# Altium PCB cando_pro.PcbDoc
Units mil, origin at the board's own origin, x right, y up, seen from the top; angles counter-clockwise.
Board outline 1900 x 629.92 mil, 2 copper layers (Top Layer, Bottom Layer); 29 components, 20 nets, 136 pads, 50 vias.
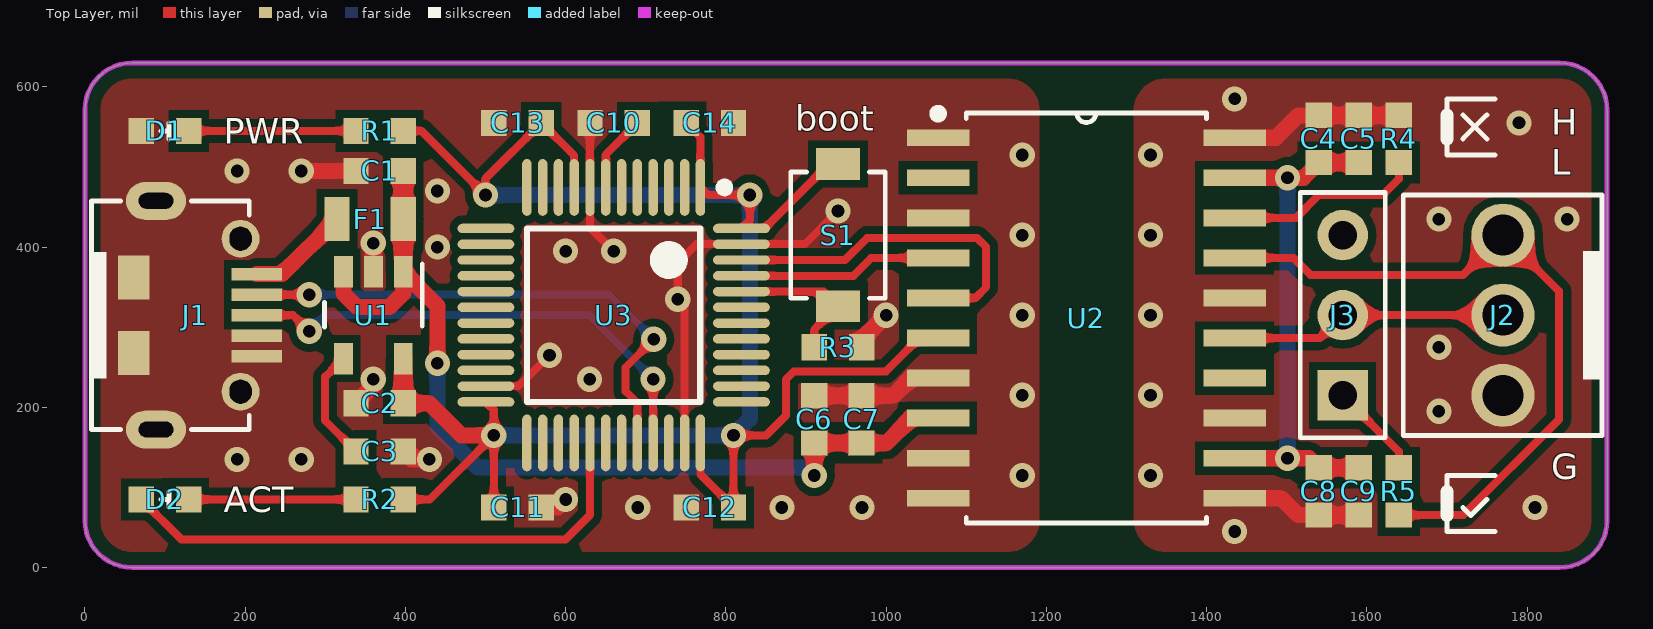
[diagram p0: Top Layer view]
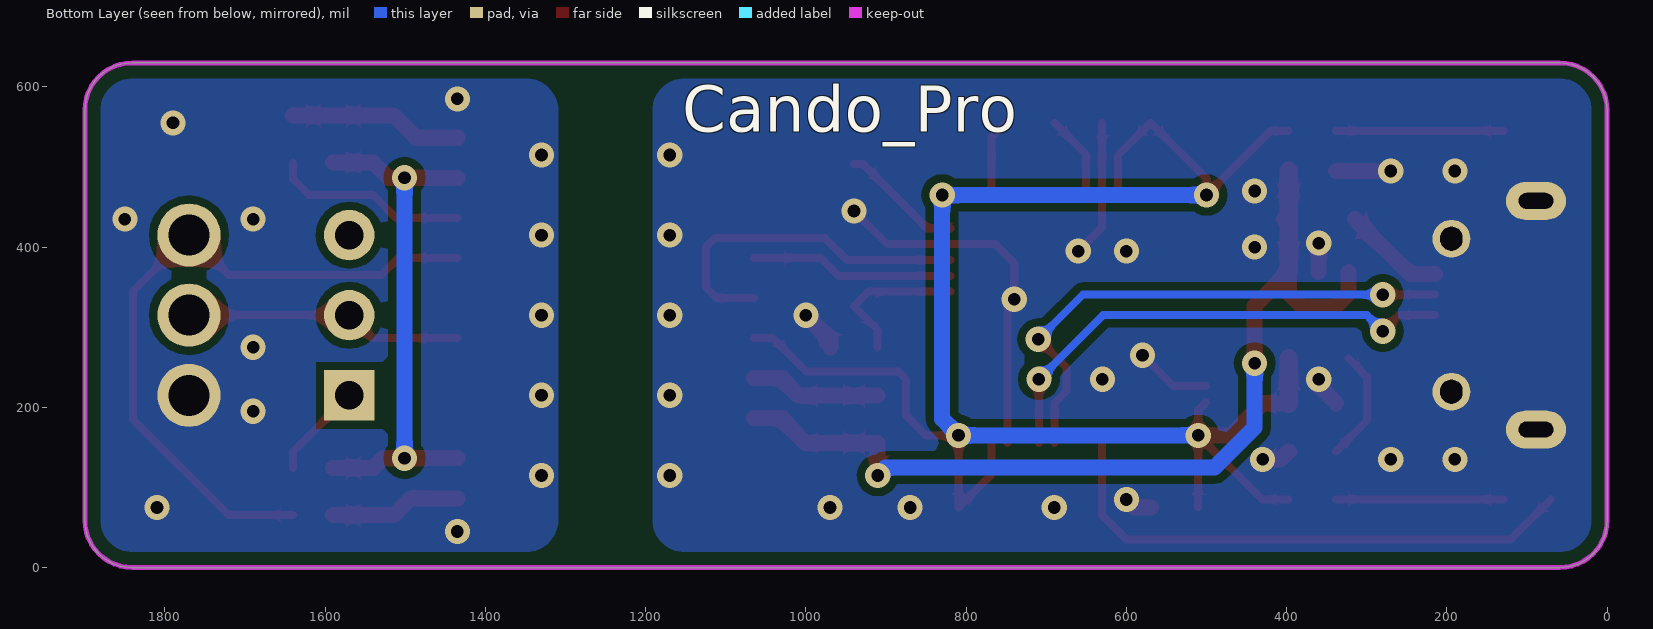
[diagram p1: Bottom Layer view, seen from below]

## Layer stack, top to bottom
Top Solder: solder mask 0.4, Solder Resist, Dk 3.5
Top Layer: signal copper 1.4
Dielectric 1: dielectric 12.6, FR-4, Dk 4.8
Bottom Layer: signal copper 1.4
Bottom Solder: solder mask 0.4, Solder Resist, Dk 3.5

## Board outline
0,59.06 0,570.87 cw(c59.06,570.87) 59.05,629.92 1840.94,629.92 cw(c1840.94,570.87) 1900,570.87 1900,59.06 cw(c1840.94,59.06) 1840.94,0 59.06,0 cw(c59.06,59.06)

## Design rules (kind name [scope] priority, off if disabled: settings)
Clearance Clearance_16 [InNamedPolygon('GND')] p1: gap=10 ignorepadtopadclearanceinfootprint=FALSE except(0: Arc-Hole Track-Hole SMDPad-Hole THPad-Hole Via-Hole Fill-Hole Poly-Hole Region-Hole Text-Hole)
Clearance Clearance_15 [InNamedPolygon('GND')] p2: gap=10 ignorepadtopadclearanceinfootprint=FALSE except(0: Arc-Hole Track-Hole SMDPad-Hole THPad-Hole Via-Hole Fill-Hole Poly-Hole Region-Hole Text-Hole)
Clearance Clearance_14 [InNamedPolygon('PGND')] p3: gap=10 ignorepadtopadclearanceinfootprint=FALSE except(0: Arc-Hole Track-Hole SMDPad-Hole THPad-Hole Via-Hole Fill-Hole Poly-Hole Region-Hole Text-Hole)
Clearance Clearance_13 [InNamedPolygon('PGND')] p4: gap=10 ignorepadtopadclearanceinfootprint=FALSE except(0: Arc-Hole Track-Hole SMDPad-Hole THPad-Hole Via-Hole Fill-Hole Poly-Hole Region-Hole Text-Hole)
Clearance Clearance_12 [InNamedPolygon('PGND')] p5: gap=10 ignorepadtopadclearanceinfootprint=FALSE except(0: Arc-Hole Track-Hole SMDPad-Hole THPad-Hole Via-Hole Fill-Hole Poly-Hole Region-Hole Text-Hole)
Clearance Clearance_11 [InNamedPolygon('PGND')] p6: gap=10 ignorepadtopadclearanceinfootprint=FALSE except(0: Arc-Hole Track-Hole SMDPad-Hole THPad-Hole Via-Hole Fill-Hole Poly-Hole Region-Hole Text-Hole)
Clearance Clearance_10 [InNamedPolygon('Bottom')] p7: gap=10 ignorepadtopadclearanceinfootprint=FALSE except(0: Arc-Hole Track-Hole SMDPad-Hole THPad-Hole Via-Hole Fill-Hole Poly-Hole Region-Hole Text-Hole)
Clearance Clearance_9 [InNamedPolygon('Bottom')] p8: gap=10 ignorepadtopadclearanceinfootprint=FALSE except(0: Arc-Hole Track-Hole SMDPad-Hole THPad-Hole Via-Hole Fill-Hole Poly-Hole Region-Hole Text-Hole)
Clearance Clearance_8 [InNamedPolygon('GND_L02_P006')] p9: gap=10 ignorepadtopadclearanceinfootprint=FALSE except(0: Arc-Hole Track-Hole SMDPad-Hole THPad-Hole Via-Hole Fill-Hole Poly-Hole Region-Hole Text-Hole)
Clearance Clearance_7 [InNamedPolygon('Top')] p10: gap=10 ignorepadtopadclearanceinfootprint=FALSE except(0: Arc-Hole Track-Hole SMDPad-Hole THPad-Hole Via-Hole Fill-Hole Poly-Hole Region-Hole Text-Hole)
Clearance Clearance_6 [InNamedPolygon('Bootom')] p11: gap=10 ignorepadtopadclearanceinfootprint=FALSE except(0: Arc-Hole Track-Hole SMDPad-Hole THPad-Hole Via-Hole Fill-Hole Poly-Hole Region-Hole Text-Hole)
Clearance Clearance_5 [InNamedPolygon('Bootom')] p12: gap=100 ignorepadtopadclearanceinfootprint=FALSE except(0: Arc-Hole Track-Hole SMDPad-Hole THPad-Hole Via-Hole Fill-Hole Poly-Hole Region-Hole Text-Hole)
Clearance Clearance_4 [InNamedPolygon('Bootom')] p13: gap=10 ignorepadtopadclearanceinfootprint=FALSE except(0: Arc-Hole Track-Hole SMDPad-Hole THPad-Hole Via-Hole Fill-Hole Poly-Hole Region-Hole Text-Hole)
Clearance Clearance_3 [InNamedPolygon('GND_L01_P000')] p14: gap=10 ignorepadtopadclearanceinfootprint=FALSE except(0: Arc-Hole Track-Hole SMDPad-Hole THPad-Hole Via-Hole Fill-Hole Poly-Hole Region-Hole Text-Hole)
Clearance Clearance_2 [InNamedPolygon('Bootom')] p15: gap=10 ignorepadtopadclearanceinfootprint=FALSE except(0: Arc-Hole Track-Hole SMDPad-Hole THPad-Hole Via-Hole Fill-Hole Poly-Hole Region-Hole Text-Hole)
Clearance [InNamedPolygon('Bootom')] p16: gap=30 ignorepadtopadclearanceinfootprint=FALSE except(0: Arc-Hole Track-Hole SMDPad-Hole THPad-Hole Via-Hole Fill-Hole Poly-Hole Region-Hole Text-Hole)
Clearance Clearance_1 [All] p17: gap=5 ignorepadtopadclearanceinfootprint=FALSE except(0: Arc-Hole Track-Hole SMDPad-Hole THPad-Hole Via-Hole Fill-Hole Poly-Hole Region-Hole Text-Hole)
Clearance Polygon [InPolygon] p18: gap=10 ignorepadtopadclearanceinfootprint=FALSE except(0: Arc-Hole Track-Hole SMDPad-Hole THPad-Hole Via-Hole Fill-Hole Poly-Hole Region-Hole Text-Hole)
PolygonConnect [All] p1: connectstyle=Direct reliefconductorwidth=10 reliefentries=4 polygonreliefangle="90 Angle" airgapwidth=10
RoutingVias [All] p1: holewidth=28 width=50 viastyle="Through Hole" minholewidth=7.87 minwidth=3.94 maxholewidth=78.74 maxwidth=393.7
SolderMaskExpansion [All] p1: expansion=4
Width [All] p1: maxlimit=236.22 minlimit=3.94 preferedwidth=10
30 further rules are at their usual default settings.

## Components (designator, comment, footprint, x,y, rotation, side; value= is the part's Value field where it differs from the comment)
C1 "10μF" 0603C 367.87,494.96 r180 top
C2 "10μF" 0603C 367.87,204.96 r180 top
C3 "22nF" 0603C 367.87,144.96 r180 top
C4 "100nF" 0603C 1540,534.96 r90 top
C5 "10nF" 0603C 1590,534.96 r90 top
C6 "10μF" 0603C 910.47,184.96 r90 top
C7 "100nF" 0603C 969.53,184.96 r90 top
C8 "10μF" 0603C 1540,94.96 r270 top
C9 "100nF" 0603C 1590,94.96 r270 top
C10 "100nF" 0603C 660,554.96 r180 top
C11 "100nF" 0603C 540,74.96 r0 top
C12 "100nF" 0603C 780,74.96 r180 top
C13 "100nF" 0603C 540,554.96 r180 top
C14 "100nF" 0603C 780,554.96 r0 top
D1 "PWR" LED_0603_GREEN 100,544.96 r180 top
D2 "ACT" LED_0603_BLUE 100,84.96 r180 top
F1 "Fuse" 0805R 356.06,434.96 r0 top
J1 "MicroUSB-B" USB-Micro 140,314.96 r0 top
J2 "" MKDSN-2.54-3P 1770,314.96 r0 top
J3 "" HEADER_2.54_3P 1570,314.96 r180 top
R1 "10K" 0603R 367.87,544.96 r180 top
R2 "10K" 0603R 367.87,84.96 r180 top
R3 "10K" 0603R 940,274.96 r0 top
R4 "10R" 0603R 1640,534.96 r270 top
R5 "120R" 0603R 1640,94.96 r90 top
S1 "Button" BTN_3*4 940,414.96 r90 top
U1 "RT9193-33GB" SOT-23-5 360,314.96 r270 top
U2 "ADM3053" RW-20 1250,311.46 r0 top
U3 "STM32F072C8T6" STM-LQFP48_N 660,314.96 r270 top

## Footprints (in the part's own frame and the unit in brackets; to place one, negate y for a bottom-side part, rotate by r counter-clockwise, add the part's x,y. Pads: shape width x height; smd on the part's side, far side on the other; paste and mask are expansions set on the pad)
0603C [mm]
  rect 0.8x0.83 smd: 1(-0.75,0) 2(0.75,0)
  body extent -0.8,-0.4 0.8,0.4, height 0.4
0603R [mm]
  rect 0.8x0.83 smd: 1(-0.75,0) 2(0.75,0)
  body extent -0.8,-0.4 0.8,0.4, height 0.4
0805R [mm]
  rect 0.8x1.4 smd: 1(-1.05,0) 2(1.05,0)
  body extent -1,-0.62 1,0.63, height 0.5
BTN_3*4 [mm]
  rect 1x1.4 smd: 1(-2.254,0) 2(2.254,0)
  silkscreen extent -2,-1.5 2,1.5, body extent -2,-1.5 2,1.5, height 2
HEADER_2.54_3P [mm]
  rect 1.6x1.6 hole 0.9: 1(0,2.54)
  round 1.6 hole 0.9: 2(0,0) 3(0,-2.54)
  silkscreen extent -1.35,-3.89 1.35,3.89, body extent -1.27,-3.81 1.27,3.81, height 8.7
LED_0603_BLUE [mm]
  rect 0.8x0.83 smd: 1(-0.75,0) 2(0.75,0)
  silkscreen extent -0.13,-0.25 0.13,0.25, body extent -0.8,-0.4 0.8,0.4, height 0.4
LED_0603_GREEN [mm]
  rect 0.8x0.83 smd: 1(-0.75,0) 2(0.75,0)
  silkscreen extent -0.13,-0.25 0.13,0.25, body extent -0.8,-0.4 0.8,0.4, height 0.4
MKDSN-2.54-3P [mm]
  round 2 hole 1.3: 1(0,2.54) 2(0,0) 3(0,-2.54)
  silkscreen extent -3.16,-3.81 3.14,3.81
RW-20 [mil]
  rect 78x21 smd: 1(-185,225) 2(-185,175) 3(-185,125) 4(-185,75) 5(-185,25) 6(-185,-25) 7(-185,-75) 8(-185,-125) 9(-185,-175) 10(-185,-225) 11(185,-225) 12(185,-175) 13(185,-125) 14(185,-75) 15(185,-25) 16(185,25) 17(185,75) 18(185,125) 19(185,175) 20(185,225)
  silkscreen extent -190,-256 150,260, body extent -203,-252 203,252, height 102
SOT-23-5 [mm]
  rect 1x0.6 smd paste+0 mask+0.051: 1(-1.375,0.95) 2(-1.375,0) 3(-1.375,-0.95) 4(1.375,-0.95) 5(1.375,0.95)
  silkscreen extent -1.63,-1.55 0.38,1.55, body extent -1.23,-1.5 1.27,1.5, height 1.05
STM-LQFP48_N [mm] "QFP, 48-Leads, Body 7x7mm, Pitch 0.5mm, IPC Medium Density"
  oval 1.8x0.3 smd: 1(-4.05,2.75) 2(-4.05,2.25) 3(-4.05,1.75) 4(-4.05,1.25) 5(-4.05,0.75) 6(-4.05,0.25) 7(-4.05,-0.25) 8(-4.05,-0.75) 9(-4.05,-1.25) 10(-4.05,-1.75) 11(-4.05,-2.25) 12(-4.05,-2.75) 25(4.05,-2.75) 26(4.05,-2.25) 27(4.05,-1.75) 28(4.05,-1.25) 29(4.05,-0.75) 30(4.05,-0.25) 31(4.05,0.25) 32(4.05,0.75) 33(4.05,1.25) 34(4.05,1.75) 35(4.05,2.25) 36(4.05,2.75)
  oval 0.3x1.8 smd: 13(-2.75,-4.05) 14(-2.25,-4.05) 15(-1.75,-4.05) 16(-1.25,-4.05) 17(-0.75,-4.05) 18(-0.25,-4.05) 19(0.25,-4.05) 20(0.75,-4.05) 21(1.25,-4.05) 22(1.75,-4.05) 23(2.25,-4.05) 24(2.75,-4.05) 37(2.75,4.05) 38(2.25,4.05) 39(1.75,4.05) 40(1.25,4.05) 41(0.75,4.05) 42(0.25,4.05) 43(-0.25,4.05) 44(-0.75,4.05) 45(-1.25,4.05) 46(-1.75,4.05) 47(-2.25,4.05) 48(-2.75,4.05)
  silkscreen extent -4.18,-2.75 2.75,3.64, body extent -4.5,-4.5 4.5,4.5, height 1.6
USB-Micro [mm]
  rect 1.6x0.4 smd: 1(1.9,1.3) 2(1.9,0.65) 3(1.9,0) 4(1.9,-0.65) 5(1.9,-1.3)
  rect 1x1.4 smd: 6(-2,-1.2) 6(-2,1.2)
  oval 1.9x1.2 hole 0.5 slot 1.1 at 0 deg: 6(-1.3,-3.625) 6(-1.3,3.625)
  round 1.2 hole 0.7 slot 0.762 at 90 deg: 6(1.38,-2.425) 6(1.38,2.425)
  silkscreen extent -3.37,-3.62 1.66,3.63, body extent -3.86,-4.1 1.57,4.1, height 2.72

## Part data
C1 C2 C3 C4 C5 C6 C7 C8 C9 C10 C11 C12 C13 C14: "Capacitor"
D1 D2: library part LED, "LED"
J1: "MicroUSB-B-SMT"
J2 J3: library part Junction_3P
R1 R2 R3 R4 R5: "Resistor"
S1: library part SW-PB
U1: "Chip, RT9193-33GB, LDO Regulator"
U2: "IC, Signal and power isolated CAN transceiver"
U3: "ARM Cortex-M0 32-bit MCU, 64 KB Flash, 8 KB Internal RAM, 39 I/Os, 48-pin LQFP, -40 to 85 degC, Tray"

## Via types
v1: diameter 31.5, hole 15.75, Top Layer to Bottom Layer, tented both sides, 48 vias
v2: diameter 31.5, hole 15.75, Top Layer to Bottom Layer, 2 vias

## Nets (pads, with @x,y where several pads share a name; then routed paths per layer and width w, separated by ;. In a path a pad name is that pad's centre, name@x,y a point inside that pad or via, vN(x,y) a via of type N, cw(c..) or ccw(c..) an arc to the next point about the centre after c; other vN are vias at no path point)
CAN_H: J2.1 R5.1 U2.17 | length 873.1
  Top Layer w10: U2.17 1508.5,386.46 1530,364.96 1720,364.96 J2.1 1840,344.96 1840,184.96 1720.47,65.43 R5.1
CAN_L: J2.2 J3.2 U2.15 | length 346.8
  Top Layer w10: U2.15 1541.5,286.46 J3.2 J2.2
CAN_RX: U2.4 U3.45 | length 254.8
  Top Layer w10: U3.45 959.21,364.17 981.5,386.46 U2.4
CAN_TX: U2.5 U3.46 | length 437.3
  Top Layer w10: U3.46 948.9,383.86 976.5,411.46 1113.5,411.46 1125,399.96 1125,349.96 1111.5,336.46 U2.5
GND: C1.2 C2.2 C3.1 C6.2 C7.2 C10.2 C11.2 C12.2 C13.2 C14.2 D1.2 J1.4 J1.5 J1.6 R3.2 U1.2 U2.1 U2.3 U2.7 U2.9 U2.10 U3.8 U3.23 U3.35 U3.47 | length 1153.4
  Top Layer w10: U3.23 541.42,226.38 v1(580,264.96) ; C10.2 U3.8 630.47,424.49 v1(660,394.96) ; U3.35 748.58,326.38 v1(740,334.96) 740,380 763.54,403.54 U3.47 898.58,403.54 v1(940,444.96)
  Top Layer w20: v1(270,494.96) C1.2 ; C2.2 360,226.61 v1(360,234.96) ; U1.2 v1(360,404.96) ; C3.1 407.4,134.96 v1(430,134.96) ; C11.2 590,74.96 v1(600,84.96) ; C6.2 C7.2 1009.53,214.49 1031.5,236.46 U2.7 ; R3.2 969.53,284.49 v1(1000,314.96)
  other v1: 690,74.96 870,74.96 970,74.96 1170,114.96 190,134.96 270,134.96 1170,214.96 630,234.96 1170,314.96 600,394.96 1170,414.96 190,494.96 1170,514.96
  other v2: 440,400 440,470
LED_ACT: D2.2 U3.29 | length 683.4
  Top Layer w10: D2.2 120.47,34.96 600,34.96 630.47,65.43 U3.29
NetC3_2: C3.2 U1.4 | length 141.1
  Top Layer w10: U1.4 300,238.23 300,183.31 C3.2
NetC4_1: C4.1 C5.1 C8.1 C9.1 U2.12 U2.19 | length 672.8
  Top Layer w10: v1(1501.03,136.46) v1@1508.03,136.46
  Top Layer w20: U2.12 v1(1501.03,136.46) ; U2.19 v1(1501.03,486.46) 1521.03,486.46 C4.1 C5.1 ; v1@1508.03,136.46 1528.03,136.46 C8.1 C9.1
  Bottom Layer w20: v1(1501.03,136.46) v1(1501.03,486.46)
NetC10_1: C10.1 U3.7 | length 96.9
  Top Layer w10: U3.7 650.16,515.59 C10.1
NetD1_1: D1.1 R1.2 | length 208.8
  Top Layer w10: D1.1 R1.2
NetD2_1: D2.1 R2.2 | length 208.8
  Top Layer w10: D2.1 R2.2
NetF1_1: F1.1 J1.1 | length 128.4
  Top Layer w20: J1.1 245.91,366.14 F1.1
NetJ3_1: J3.1 R5.2 | length 119.5
  Top Layer w10: J3.1 1640,144.96 R5.2
NetR3_1: R3.1 S1.1 U3.44 | length 191.6
  Top Layer w10: U3.44 921.73,344.49 S1.1 910.47,296.69 R3.1
NetR4_2: R4.2 U2.18 | length 245.4
  Top Layer w10: U2.18 1511.5,436.46 1540,464.96 1620,464.96 1640.24,485.2 R4.2@1640.24,505.2
PGND: C4.2 C5.2 C8.2 C9.2 J2.3 R4.1 U2.11 U2.13 U2.16 U2.20 | length 380.3
  Top Layer w20: U2.11 1493.54,86.46 1514.57,65.43 C8.2 C9.2 ; U2.20 1486.46,536.46 1514.49,564.49 C4.2 C5.2 R4.1
  other v1: 1435,44.96 1810,74.96 1330,114.96 1690,194.96 1330,214.96 1690,274.96 1330,314.96 1330,414.96 1690,434.96 1850,434.96 1330,514.96 1790,554.96 1435,584.96
USB_DM: J1.2 U3.32 | length 668.2
  Top Layer w10: J1.2 v1(280,340.55) ; U3.32 689.53,205.43 675,219.96 675,249.96 v1(710,284.96)
  Bottom Layer w10: v1(280,340.55) 654.41,340.55 v1(710,284.96)
USB_DP: J1.3 U3.33 | length 623.6
  Top Layer w10: J1.3 260,314.96 v1(280,294.96) ; U3.33 v1(709.21,234.96)
  Bottom Layer w10: v1(280,294.96) 300,314.96 629.21,314.96 v1(709.21,234.96)
V3.3: C2.1 C11.1 C12.1 C13.1 C14.1 R1.1 R2.1 S1.2 U1.5 U2.6 U3.1 U3.9 U3.24 U3.36 U3.48 | length 2620.5
  Top Layer w10: R2.1 430.47,84.96 v1(510.47,164.96) ; R1.1 420,544.96 v1(500,464.96) 500,485.43 C13.1 570,554.96 610.79,514.17 U3.9 ; U3.24 510.47,196.77 v1(510.47,164.96) ; C11.1 v1(510.47,164.96) ; C14.1 768.27,537.17 U3.1 777.72,464.96 v1(830,464.96) 830,433.78 U3.48 ; U3.36 768.27,116.22 C12.1 809.53,164.49 810,164.96 850,164.96 875,189.96 875,234.96 885,244.96 1000,244.96 1041.5,286.46 U2.6 ; U3.48@830,423.23 848.27,423.23 928.74,503.7 S1.2
  Top Layer w20: C2.1 430,204.96 470,164.96 v1(510.47,164.96)
  Top Layer w23.62: C2.1 U1.5
  Bottom Layer w20: v1(500,464.96) v1(830,464.96) 830,185.43 v1(809.53,164.96) ; v1(510.47,164.96) v1(809.53,164.96) ; v1@810,164.96 v1(809.53,164.96)
VCC: C1.1 C6.1 C7.1 F1.2 U1.1 U1.3 U2.8 | length 1193
  Top Layer w20: U1.3 322.6,342.36 340,324.96 380,324.96 397.4,342.36 U1.1 440,326.5 v1(440,254.96) ; F1.2 F1.2@401.34,434.96 ; v1(910.47,114.96) C6.1 C7.1 1000.47,155.43 1031.5,186.46 U2.8
  Top Layer w23.62: U1.1 F1.2@397.4,431.02 ; C1.1 F1.2 F1.2@397.4,431.02 ; F1.2@401.34,434.96 F1.2@397.4,431.02
  Bottom Layer w20: v1(440,254.96) 440,174.96 490,124.96 900.47,124.96 v1(910.47,114.96)
pads on no net: J3.3 U2.2 U2.14 U3.2 U3.3 U3.4 U3.5 U3.6 U3.10 U3.11 U3.12 U3.13 U3.14 U3.15 U3.16 U3.17 U3.18 U3.19 U3.20 U3.21 U3.22 U3.25 U3.26 U3.27 U3.28 U3.30 U3.31 U3.34 U3.37 U3.38 U3.39 U3.40 U3.41 U3.42 U3.43

## Polygon pours and split planes (outlines as drawn)
PGND on Top Layer "PGND" (solid, remove dead copper, pour order 23): 1348.82,610.24 ccw(c1348.82,570.87) 1309.45,570.87 1309.45,59.06 ccw(c1348.82,59.06) 1348.82,19.68 1840.94,19.68 ccw(c1840.94,59.06) 1880.31,59.06 1880.31,570.87 ccw(c1840.94,570.87) 1840.94,610.24
GND on Top Layer "GND" (solid, remove dead copper, pour order 27): 19.68,570.87 cw(c59.06,570.87) 59.06,610.24 1151.97,610.24 cw(c1151.97,570.87) 1191.34,570.87 1191.34,59.06 cw(c1151.97,59.06) 1151.97,19.69 59.06,19.69 cw(c59.06,59.06) 19.68,59.06
GND on Bottom Layer "GND" (solid, remove dead copper, pour order 29): 19.68,570.87 cw(c59.06,570.87) 59.06,610.24 1151.97,610.24 cw(c1151.97,570.87) 1191.34,570.87 1191.34,59.06 cw(c1151.97,59.06) 1151.97,19.69 59.06,19.69 cw(c59.06,59.06) 19.68,59.06
PGND on Bottom Layer "PGND" (solid, remove dead copper, pour order 31): 1348.82,610.24 ccw(c1348.82,570.87) 1309.45,570.87 1309.45,59.06 ccw(c1348.82,59.06) 1348.82,19.68 1840.94,19.68 ccw(c1840.94,59.06) 1880.31,59.06 1880.31,570.87 ccw(c1840.94,570.87) 1840.94,610.24

## Keep-outs
Keep-Out Layer:
  the board outline again, w6

## Silkscreen, mask and mechanical layers (free items; w line width, h text height)
Top Overlay:
  lines w6: 1720,74.96 1730,64.96 1750,84.96 ; 1720,534.96 1750,564.96 ; 1720,564.96 1750,534.96 ; 1760,44.96 1700,44.96 1700,114.96 1760,114.96 ; 1760,514.96 1700,514.96 1700,584.96 1760,584.96
  lines w16: 1700,64.96 1700,94.96 ; 1700,534.96 1700,564.96
  text "boot" at 886.68,544.96 h32
  text "H" at 1830,540 h32
  text "PWR" at 173.33,528.97 h32
  text "L" at 1830,490 h32
  text "G" at 1830,110 h32
  text "ACT" at 173.33,68.97 h32
Bottom Overlay:
  text "Cando_Pro" at 1154.16,524.96 h98.43
Mechanical 1:
  lines w6: -10,0 10,0 ; 0,-10 0,10